# Altium PCB ADC_PIC32_LVDS_DRIVER_Subsystem.PcbDoc
Units mil, origin at the board's own origin, x right, y up, seen from the top; angles counter-clockwise.
Board outline 7000 x 5000 mil, 2 copper layers (Top Layer, Bottom Layer), stack 44.8 mil thick; 22 components, 56 nets, 174 pads, 27 vias.
Unrouted connection lines stored in the file: 3.
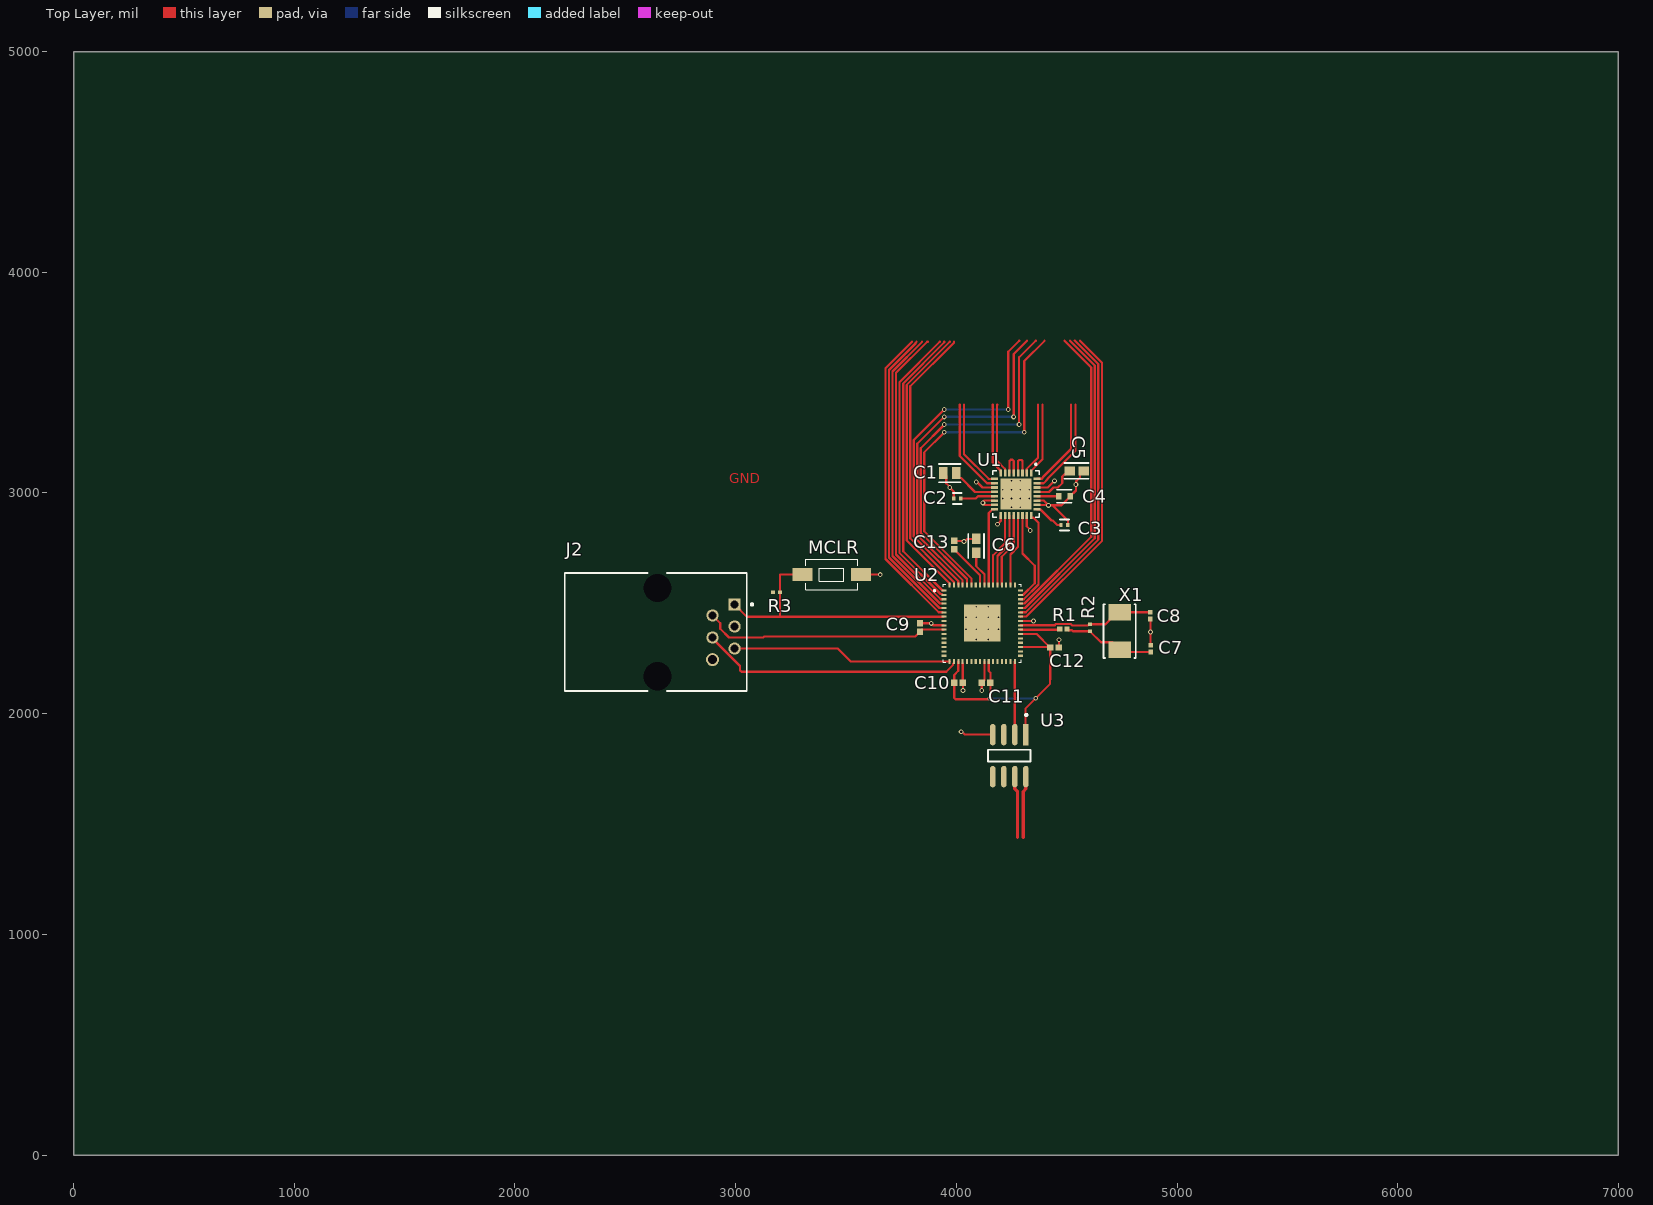
[diagram p0: Top Layer view]
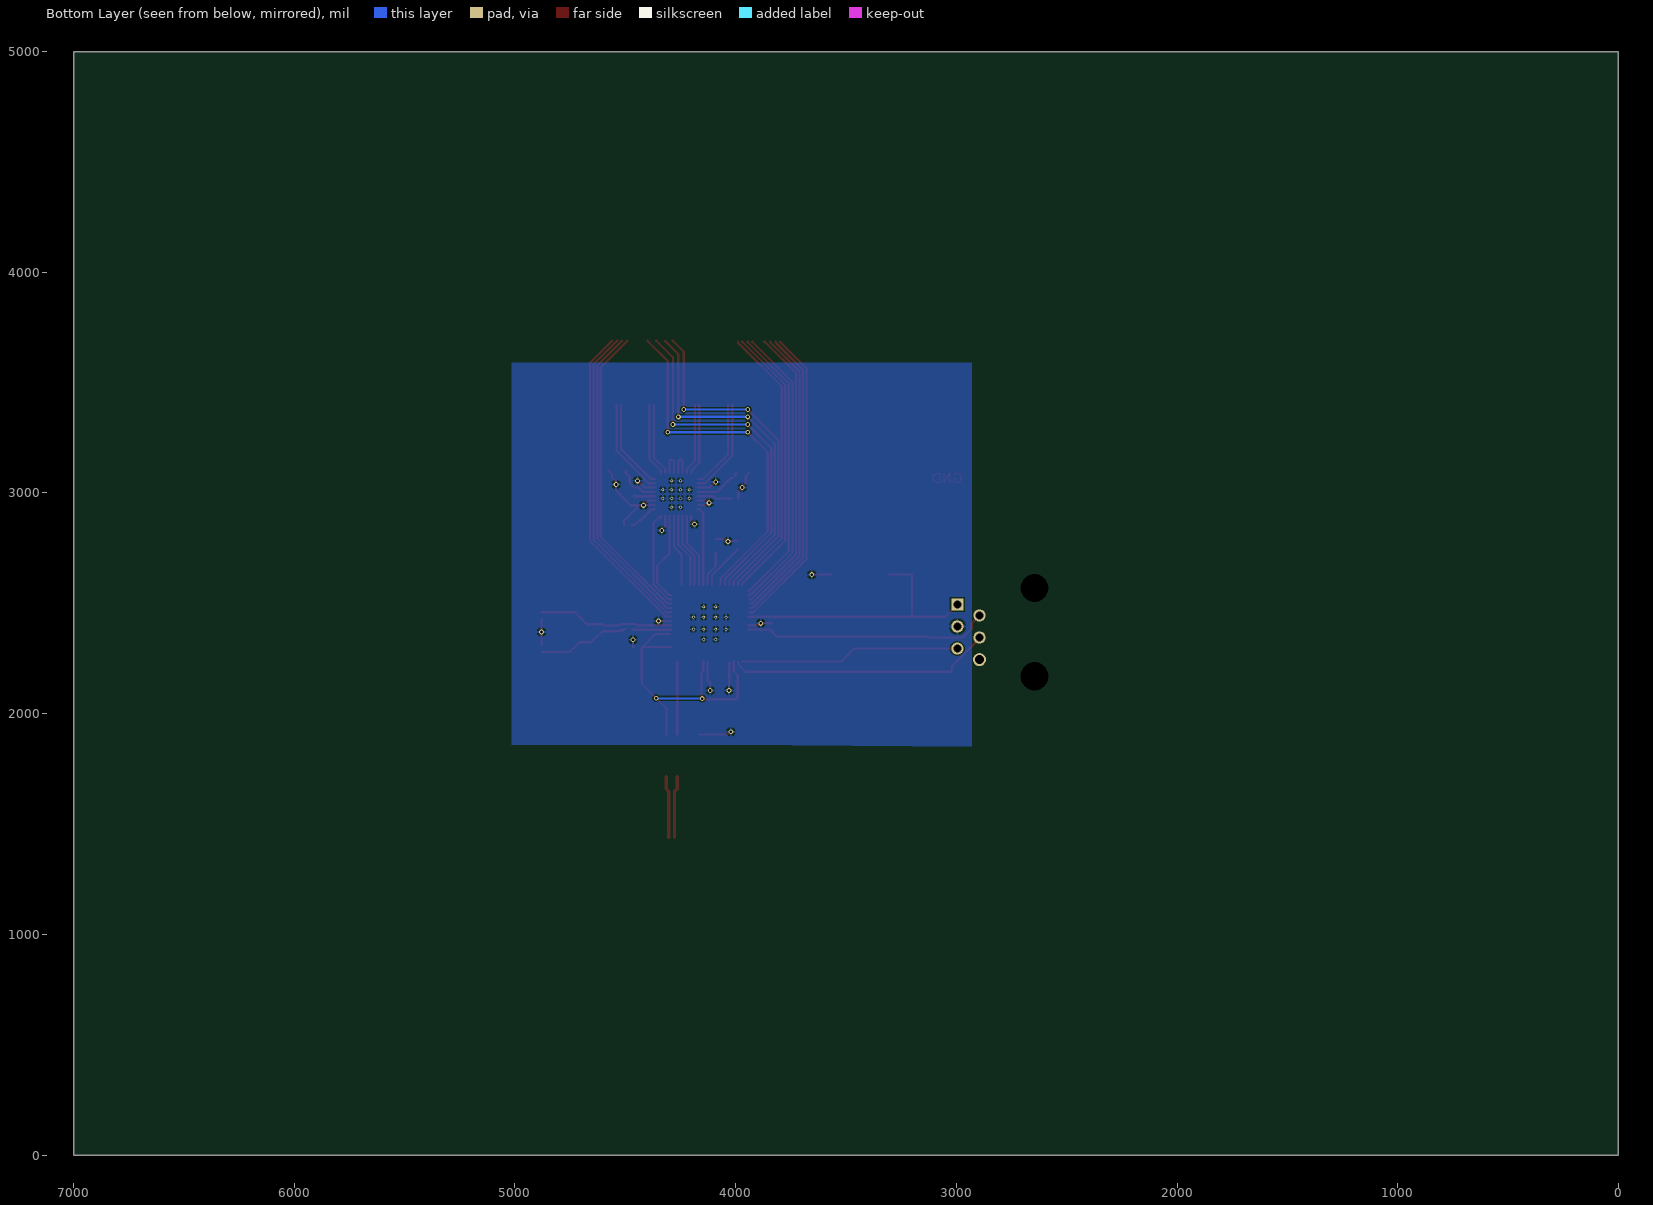
[diagram p1: Bottom Layer view, seen from below]
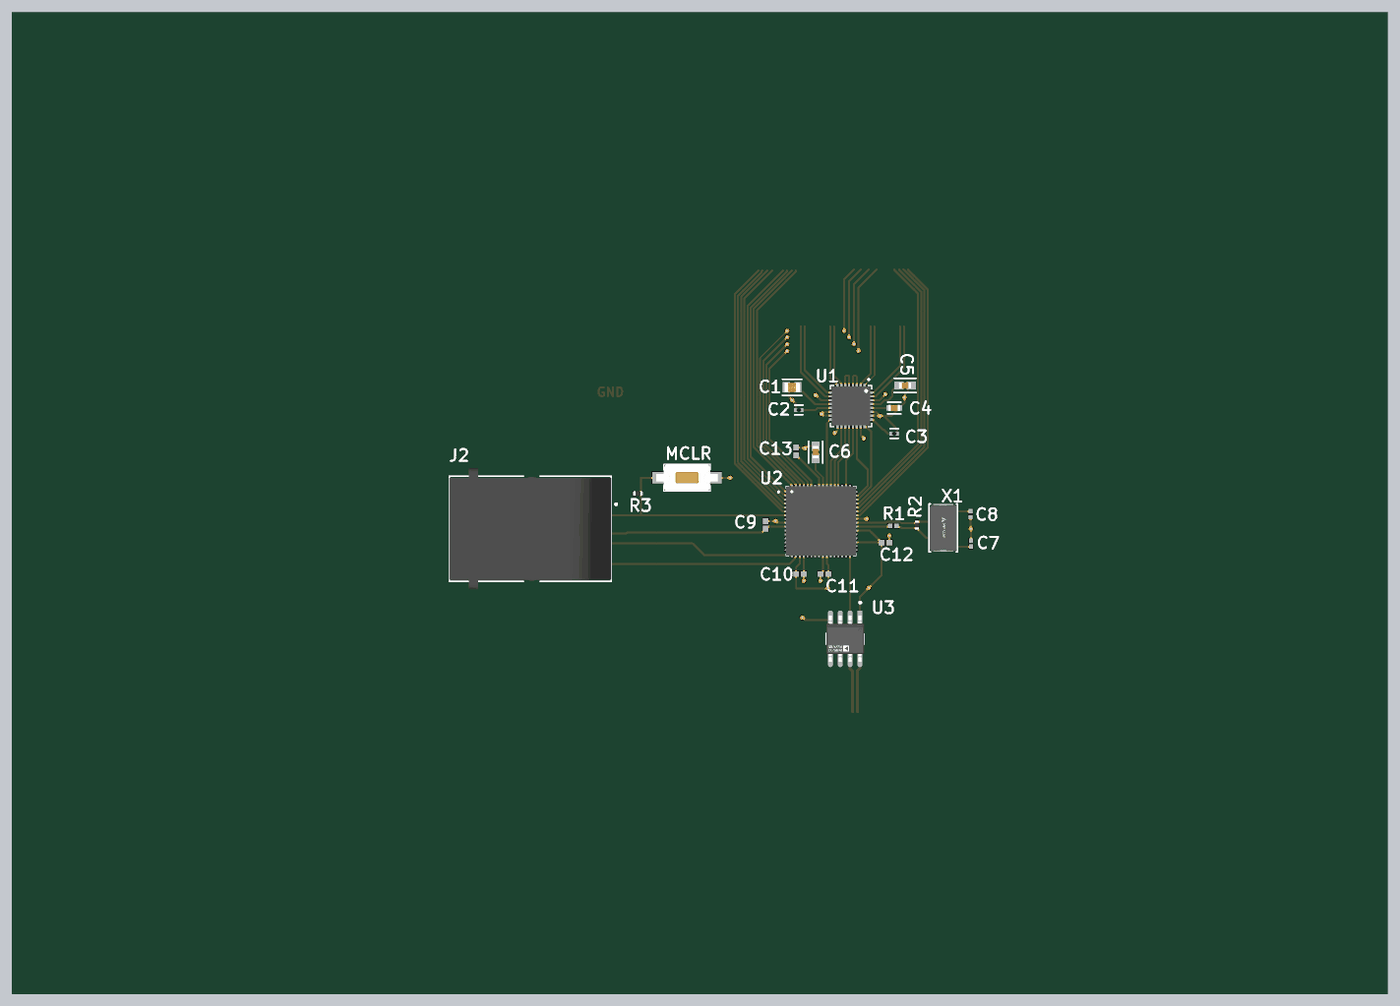
[diagram p2: 3D render of the assembled board from above, using the file's embedded part models]

## Layer stack, top to bottom
Top Solder: solder mask 0.4, Solder Resist, Dk 3.5
Top Layer: signal copper 1.4
Dielectric 1: dielectric 42, FR-4, Dk 4.8
Bottom Layer: signal copper 1.4
Bottom Solder: solder mask 0.4, Solder Resist, Dk 3.5

## Board outline
0,0 7000,0 7000,5000 0,5000

## Design rules (kind name [scope] priority, off if disabled: settings)
Clearance [All] p1: gap=6 ignorepadtopadclearanceinfootprint=FALSE
DiffPairsRouting [All] p1: maxlimit=12 minlimit=8 mostfreqgap=10 toplayer_minwidth=5 toplayer_maxwidth=15 toplayer_prefwidth=8 bottomlayer_minwidth=5 bottomlayer_maxwidth=15 bottomlayer_prefwidth=8 maxuncoupledlength=500
MinimumSolderMaskSliver [All] p1: minsoldermaskwidth=5
PolygonConnect [All] p1: connectstyle=Relief reliefconductorwidth=10 reliefentries=4 polygonreliefangle="90 Angle" airgapwidth=10
RoomDefinition PIC32_Subsystem [InComponentClass('PIC32_Subsystem')] p1: confinementstyle=ConfineIn formatcopy=TRUE lockcomponents=FALSE outline 3105,1780 4935,1780 4935,2845 3105,2845
RoomDefinition ADC_Subsystem [InComponentClass('ADC_Subsystem')] p2: confinementstyle=ConfineIn formatcopy=TRUE lockcomponents=FALSE outline 3775,2815 4785,2815 4785,3844.22 3775,3844.22
RoomDefinition PGA [InComponentClass('PGA')] p3: confinementstyle=ConfineIn formatcopy=TRUE lockcomponents=FALSE outline 3210,3380 5210,3380 5210,4985 3210,4985
RoomDefinition LVDS_Driver_Subsystem [InComponentClass('LVDS_Driver_Subsystem')] p4: confinementstyle=ConfineIn formatcopy=TRUE lockcomponents=FALSE outline 3815,1350 4400,1350 4400,2030 3815,2030
RoomDefinition ICD4_INTERFACE_MODULE [InComponentClass('ICD4_INTERFACE_MODULE')] p5: confinementstyle=ConfineIn formatcopy=TRUE lockcomponents=FALSE outline 3145,1940 2015,1940 2015,2870 3145,2870
RoutingVias [All] p1: holewidth=10 width=20 viastyle="Through Hole" minholewidth=9 minwidth=18 maxholewidth=25 maxwidth=48
ShortCircuit [All] p1: allowed=TRUE
SolderMaskExpansion [All] p1: expansion=4 istentingtop=FALSE
Width [All] p1: maxlimit=10 minlimit=5 preferedwidth=6 minimp=50.000000 maximp=50.000000 favimp=50.000000
27 further rules are at their usual default settings.

## Classes and differential pairs
component class PGA: U4 U5
component class ICD4_INTERFACE_MODULE: J2
net class N000-1_[0..8]: Input_Channels[0..8]
component class PIC32_Subsystem: C6 C7 C8 C9 C10 C11 C12 C13 MCLR MM R1 R2 R3 U2 X1
component class LVDS_Driver_Subsystem: U3
component class ADC_Subsystem: C1 C2 C3 C4 C5 MM U1
differential pair DOUT: +DOUT_P -DOUT_N
differential pair ADC_CH6_CH7: +ADC_CH6_CH7_P -ADC_CH6_CH7_N
differential pair ADC_CH4_CH5: +ADC_CH4_CH5_P -ADC_CH4_CH5_N
differential pair ADC_CH2_CH3: +ADC_CH2_CH3_P -ADC_CH2_CH3_N
differential pair ADC_CH0_CH1: +ADC_CH0_CH1_P -ADC_CH0_CH1_N

## Components (designator, comment, footprint, x,y, rotation, side; value= is the part's Value field where it differs from the comment)
C1 "47uF" FP-C0805C476M9PACTU-MFG 3970,3090 r180 top
C2 "0.1uF" FP-GRM15-MFG 4004.25,2975 r180 top value=0.10μF
C3 "0.1uF" FP-GRM15-MFG 4490,2855 r180 top value=0.10μF
C4 "2.2uF" FP-GRM188-0_1-e0_2_0_5-MFG 4490,2985 r180 top
C5 "10uF" FP-GRM188-0_1-e0_2_0_55-IPC_A 4545,3100 r180 top
C6 "10uF" FP-GRM188-0_1-e0_2_0_55-IPC_A 4090,2760 r90 top
C7 "18pF" CAPC1005X55X25LL05T10 4880,2294.56 r90 top
C8 "18pF" CAPC1005X55X25LL05T10 4878.43,2444.21 r270 top
C9 "0.1uF" CAPC1050X55X23ML05T13 3835,2390 r270 top
C10 "0.1uF" CAPC1050X55X23ML05T13 4010,2140 r180 top
C11 "0.1uF" CAPC1050X55X23ML05T13 4135,2140 r0 top
C12 "0.1uF" CAPC1050X55X23ML05T13 4445,2300 r180 top
C13 "0.1uF" CAPC1050X55X23ML05T13 3990,2764.29 r270 top
J2 "5520470-3" TECO-5520470-3_V 2700,2370 r270 top
MCLR "434121043816" 434121043816 3435,2630 r180 top
R1 "0R" RESC1005X40X25NL05T10 4485,2384.21 r0 top
R2 "1M" RESC1005X40X25LL05T05 4605,2389.21 r270 top
R3 "10k" RESC1005X40X25LL05T05 3185,2550 r180 top
U1 "LTC2373CUH-16#PBF" LTC_2373_Footprint 4270,2995 r270 top
U2 "PIC32MX470-F512H-120MR" QFN50P900X900X100-65N 4117.36,2410 r0 top
U3 "ADN4661BRZ" FP-R-8-IPC_A 4240,1810 r270 top
X1 "20MHz" FP-ABM7-MFG 4740,2374.21 r270 top

## Footprints (in the part's own frame and the unit in brackets; to place one, negate y for a bottom-side part, rotate by r counter-clockwise, add the part's x,y. Pads: shape width x height; smd on the part's side, far side on the other; paste and mask are expansions set on the pad)
434121043816 [mm] "6.0*3.5mm vertical type, SMD, height 4.3mm, black actuator, 160gf, T&R"
  rect 2.3x1.5 smd: 1(-3.35,0) 2(3.35,0)
  silkscreen extent -3,-1.75 3,1.75, body extent -4,-1.75 4,1.75, height 4.3
CAPC1005X55X25LL05T10 [mm] "Chip Capacitor, 2-Leads, Body 1.00x0.50mm, IPC High Density"
  rect 0.56x0.52 smd: 1(-0.39,0) 2(0.39,0)
  body extent -0.53,-0.28 0.53,0.28, height 0.55
CAPC1050X55X23ML05T13 [mm] "Chip Capacitor, 2-Leads, Body 1.05x0.55mm, IPC Low Density"
  rect 0.76x0.72 smd: 1(-0.49,0) 2(0.49,0)
  body extent -0.53,-0.28 0.53,0.27, height 0.55
FP-ABM7-MFG [mm]
  rect 1.9x2.6 smd paste+0 mask+0: 1(-2.15,0) 2(2.15,0)
  silkscreen extent -3.1,-1.85 3.1,1.85, body extent -3.2,-1.95 3.2,1.95, height 0.25
FP-C0805C476M9PACTU-MFG [mm]
  rect 0.95x1.35 smd paste+0 mask+0: 1(-0.75,0) 2(0.75,0)
  silkscreen extent -1.25,-1.05 1.25,1.05, body extent -1.4,-0.85 1.4,0.85, height 0.25
FP-GRM15-MFG [mm]
  rect 0.4x0.5 smd paste+0 mask+0: 1(-0.4,0) 2(0.4,0)
  silkscreen extent -0.53,-0.62 0.53,0.62, body extent -0.7,-0.38 0.7,0.38, height 0.25
FP-GRM188-0_1-e0_2_0_5-MFG [mm]
  rect 0.65x0.7 smd paste+0 mask+0: 1(-0.675,0) 2(0.675,0)
  silkscreen extent -0.85,-0.75 0.85,0.75, body extent -1.1,-0.55 1.1,0.55, height 0.25
FP-GRM188-0_1-e0_2_0_55-IPC_A [mil]
  rect 47.57x39.85 smd paste+0 mask+0: 1(-31.57,0) 2(31.57,0)
  silkscreen extent -55,-36 55,36, body extent -75,-40 75,40, height 10
FP-R-8-IPC_A [mil]
  rect 97.4x24.49 smd paste+0 mask+0: 1(-95.12,75)
  rrect100% 97.4x24.49 smd paste+0 mask+0: 2(-95.12,25) 3(-95.12,-25) 4(-95.12,-75) 5(95.12,-75) 6(95.12,-25) 7(95.12,25) 8(95.12,75)
  silkscreen extent -189,-96 27,96, body extent -164,-116 164,116, height 10
LTC_2373_Footprint [mm]
  rect 0.805x0.3 smd: 1(-2.452,1.75) 2(-2.452,1.25) 3(-2.452,0.75) 4(-2.452,0.25) 5(-2.452,-0.25) 6(-2.452,-0.75) 7(-2.452,-1.25) 8(-2.452,-1.75) 17(2.452,-1.75) 18(2.452,-1.25) 19(2.452,-0.75) 20(2.452,-0.25) 21(2.452,0.25) 22(2.452,0.75) 23(2.452,1.25) 24(2.452,1.75)
  rect 0.3x0.805 smd: 9(-1.75,-2.452) 10(-1.25,-2.452) 11(-0.75,-2.452) 12(-0.25,-2.452) 13(0.25,-2.452) 14(0.75,-2.452) 15(1.25,-2.452) 16(1.75,-2.452) 25(1.75,2.452) 26(1.25,2.452) 27(0.75,2.452) 28(0.25,2.452) 29(-0.25,2.452) 30(-0.75,2.452) 31(-1.25,2.452) 32(-1.75,2.452)
  rect 3.55x3.55 smd paste-3: 33(0,0)
  silkscreen extent -3.53,-2.67 2.67,2.67, body extent -2.5,-2.5 2.5,2.5, height 0.8
QFN50P900X900X100-65N [mm]
  rrect25% 0.6x0.24 smd: 1(-4.4,3.75) 2(-4.4,3.25) 3(-4.4,2.75) 4(-4.4,2.25) 5(-4.4,1.75) 6(-4.4,1.25) 7(-4.4,0.75) 8(-4.4,0.25) 9(-4.4,-0.25) 10(-4.4,-0.75) 11(-4.4,-1.25) 12(-4.4,-1.75) 13(-4.4,-2.25) 14(-4.4,-2.75) 15(-4.4,-3.25) 16(-4.4,-3.75) 33(4.4,-3.75) 34(4.4,-3.25) 35(4.4,-2.75) 36(4.4,-2.25) 37(4.4,-1.75) 38(4.4,-1.25) 39(4.4,-0.75) 40(4.4,-0.25) 41(4.4,0.25) 42(4.4,0.75) 43(4.4,1.25) 44(4.4,1.75) 45(4.4,2.25) 46(4.4,2.75) 47(4.4,3.25) 48(4.4,3.75)
  rrect25% 0.24x0.6 smd: 17(-3.75,-4.4) 18(-3.25,-4.4) 19(-2.75,-4.4) 20(-2.25,-4.4) 21(-1.75,-4.4) 22(-1.25,-4.4) 23(-0.75,-4.4) 24(-0.25,-4.4) 25(0.25,-4.4) 26(0.75,-4.4) 27(1.25,-4.4) 28(1.75,-4.4) 29(2.25,-4.4) 30(2.75,-4.4) 31(3.25,-4.4) 32(3.75,-4.4) 49(3.75,4.4) 50(3.25,4.4) 51(2.75,4.4) 52(2.25,4.4) 53(1.75,4.4) 54(1.25,4.4) 55(0.75,4.4) 56(0.25,4.4) 57(-0.25,4.4) 58(-0.75,4.4) 59(-1.25,4.4) 60(-1.75,4.4) 61(-2.25,4.4) 62(-2.75,4.4) 63(-3.25,4.4) 64(-3.75,4.4)
  rect 4.25x4.25 smd paste-1.53 mask+0: 65(0,0)
  round 0.3 hole 0.2 mask+0: 66(-0.695,1.875) 67(0.695,1.875) 68(-1.875,0.695) 69(-0.695,0.695) 70(0.695,0.695) 71(1.875,0.695) 72(-1.875,-0.695) 73(-0.695,-0.695) 74(0.695,-0.695) 75(1.875,-0.695) 76(-0.695,-1.875) 77(0.695,-1.875)
  silkscreen extent -5.59,-4.5 4.5,4.5, body extent -4.5,-4.5 4.5,4.5, height 1
RESC1005X40X25LL05T05 [mm] "Chip Resistor, 2-Leads, Body 1.05x0.55mm, IPC High Density"
  rect 0.45x0.45 smd: 1(-0.4,0) 2(0.4,0)
  body extent -0.53,-0.28 0.53,0.28, height 0.4
RESC1005X40X25NL05T10 [mm] "Chip Resistor, 2-Leads, Body 1.00x0.50mm, IPC Medium Density"
  rect 0.6x0.55 smd: 1(-0.425,0) 2(0.425,0)
  body extent -0.53,-0.27 0.53,0.28, height 0.4
TECO-5520470-3_V [mm] "THD, 6-Leads, Body 20.96x13.59mm, Pitch 1.27mm"
  rect 1.4x1.4 hole 0.89: 1(-3.175,7.5)
  round 1.4 hole 0.89: 2(-1.905,4.96) 3(-0.635,7.5) 4(0.635,4.96) 5(1.905,7.5)
  round 1.5 hole 1: 6(3.175,4.96)
  round 3 hole 3.25 unplated: MH1(-5.075,-1.39) MH2(5.085,-1.39)
  silkscreen extent -6.8,-12.06 6.8,9.62, body extent -7.87,-12.06 7.87,8.9, height 16.04

## Part data
C1: library part CMP-2007-01008-2, "CAP CER 47UF 6.3V X5R 0805 / C0805C476M9PACTU", Case Code (Imperial)=0805, Case Code (Metric)=2012, Dielectric=X5R, Dielectric Material=Ceramic, Max Operating Temperature=85°C, Min Operating Temperature=-55°C, Package Quantity=3000, Tolerance=20%, Voltage=6.3V, Capacitance=47uF, Case/Package=0805, Construction=Flat, Depth=1.25mm, Dissipation Factor=5%, Height=1.25mm, Length=2mm, Mount=PCB, Number of Pins=2, Packaging="Tape and Reel", Radiation Hardening=No, REACH SVHC="No SVHC", RoHS Compliant=Yes, Series=C0805C, Termination=SMD/SMT, Voltage Rating=6.3V, Voltage Rating (DC)=6.3V, Width=1.2mm
C2 C3: library part CMP-2100-03641-2, "CAP CER 0.1UF 16V X7R 0402 / GRM155R71C104KA88D", Capacitance=0.10μF, Manufacturer=Murata, Manufacturer Part Number=GRM155R71C104KA88D, Package=GRM15, Temperature="-55°C to +125°C", Temperature Characteristic=X7R, Temperature Range High=+125°C, Temperature Range Low=-55°C, Tolerance=10%, Voltage Rating=16Vdc, Category=Cap, ComponentLink2Description=Datasheet, ComponentLink2URL=https://search.murata.co.jp/Ceramy/image/img/A01X/G101/ENG/GRM155R71H471KA01-01A.pdf, Device Class L1="Passive Components", Device Class L2=Capacitors, Device Class L3="Ceramic Capacitors", Digikey Description="CAP CER 0.1UF 16V X7R 0402", Height=0.55mm, Ipc Land Pattern Name=CAPC10050X219, Lead Free=yes, Material=Ceramic, Mouser Description="0402 0.1 uF 16V ±10 % Tolerance X7R SMT Multilayer Ceramic Capacitor", Octopart=https://octopart.com/grm155r71c104ka88d-murata-196880, RoHS=TRUE, Standoff Height=0mm
C4: library part CMP-2006-02836-2, "Chip Multilayer Ceramic Capacitors for General Purpose, 0603, 2.2uF, X7R, 15%, 10%, 10V / GRM188R71A225KE15D", Case Code (Imperial)=0603, Case Code (Metric)=1608, Dielectric=X7R, Max Operating Temperature=125°C, Min Operating Temperature=-55°C, Package Quantity=1, Tolerance=10%, Voltage=10V, Capacitance=2.2uF, Case/Package=0603, Depth=0.8mm, Height=0.8mm, Lead Free="Lead Free", Length=1.6mm, Material=Ceramic, Mount="Surface Mount", Number of Pins=2, Packaging="Cut Tape", REACH SVHC="No SVHC", Termination=SMD/SMT, Thickness=0.035inch, Voltage Rating=10V, Voltage Rating (DC)=10V, Weight=7.1E-05oz, Width=0.031inch
C5 C6: library part CMP-2006-02792-2, "Chip Multilayer Ceramic Capacitors for General Purpose, 0603, 10uF, X5R, 15%, 20%, 6.3V / GRM188R60J106ME47D", Case Code (Imperial)=0603, Case Code (Metric)=1608, Dielectric=X5R, Max Operating Temperature=85°C, Min Operating Temperature=-55°C, Package Quantity=4000, Tolerance=20%, Voltage=6.3V, Capacitance=10uF, Case/Package=0603, Depth=0.8mm, Height=0.8mm, Lead Free="Lead Free", Length=1.6mm, Material=Ceramic, Mount="Surface Mount", Packaging="Tape and Reel", Radiation Hardening=No, REACH SVHC="No SVHC", Termination=SMD/SMT, Thickness=0.035inch, Voltage Rating=6.3V, Voltage Rating (DC)=6.3V, Width=0.031inch
C7 C8: library part CMP-2008-04271-1, "GRM1555C1H180GA01D", Manufacturer=Murata, Part Number=GRM1555C1H180GA01D
C9 C10 C11 C12 C13: library part CMP-2000-05439-1, "Chip Capacitor, 100 nF, +/- 10%, 16 V, -55 to 125 degC, 0402 (1005 Metric), RoHS, Tape and Reel / CL05B104KO5NNNC", Capacitance=100000pF, Case Size/Dimension=0402, Dielectric=X7R, Manufacturer="Samsung Electro-Mechanics", Rated Voltage=16V, Tolerance (%)=±10%, Datasheet URL=https://datasheet.ciiva.com/29198/458718-da-01-en-vs-kondensator-0402-29198423.pdf, Datasheet Version=Nov-10, Manufacturer URL=http://www.samsungsem.com/global/index.jsp
J2: library part CMP-1682-00001-5, "Modular Jack, 6 Position, Right Angle, RoHS, Tray", Colour=Black, Current Rating="1.5 A", Manufacturer="TE Connectivity", Max Voltage Rating (AC)="150 V", Package Quantity=176, ComponentLink1Description="Manufacturer URL", ComponentLink1URL=http://www.te.com/, ComponentLink2Description=Datasheet, ComponentLink2URL=http://www.te.com/commerce/DocumentDelivery/DDEController?Action=srchrtrv&DocNm=5520470&DocType=Customer+Drawing&DocLang=English, Contact Finish=Gold, Contact Material=Bronze, Contact Plating=Gold, DatasheetVersion="Rev. B1, 03/2011", Height="16.13 mm", Housing Material=PBT, Lead Pitch="2.54 mm", Length="13.34 mm", Mount="Through Hole", Mounting Technology="Through Hole", PackageDescription="Female Header, Pitch 1.27 mm, 2 x 3 Position, Height 16.13 mm, Tail Length 4.32 mm", PackageReference=5520470-3, Packaging=Tray, Pins=6, REACH SVHC=Unknown, RoHSCompliant=true, Voltage Rating="150 V"
MCLR: library part CMP-1459-00005-1, "WS-TASV SMD Tact Switch 6.0X3.5 mm", Manufacturer="Wuerth Elektronik", ComponentLink1Description="Manufacturer URL", ComponentLink1URL=http://www.we-online.com, ComponentLink2Description=Datasheet, ComponentLink2URL=http://katalog.we-online.de/em/datasheet/434121043816.pdf, NoPins=02, PackageReference=434121043816, PartNumber=434121043816
R1: library part CMP-1011-00001-2, "RC0402JR-070RL", Manufacturer="Yageo / Phycomp", Part Number=RC0402JR-070RL
R2: library part CMP-2002-00609-3, "Chip Resistor, 1 MOhm, +/- 1%, 100 mW, -55 to 155 degC, 0402 (1005 Metric), RoHS, Tape and Reel / ERJ-2RKF1004X", Case Code (Imperial)=0402, Case Code (Metric)=1005, Manufacturer="Basic Passives", Max Operating Temperature="155 degC", Min Operating Temperature="-55 degC", Package Quantity=10000, PartNumber=ERJ-2RKF1004X, Power Rating="100 mW", Resistance="1 MOhm", Tolerance=1%, Voltage Rating="50 V", Case\/Package=0402, ComponentLink1Description="Manufacturer URL", ComponentLink1URL=http://www.panasonic.com/, ComponentLink2Description=Datasheet, ComponentLink2URL=http://industrial.panasonic.com/cdbs/www-data/pdf/RDA0000/AOA0000C86.pdf, DatasheetVersion=04/2015, Height="0.35 mm", Length="1 mm", Mount="Surface Mount", Mounting Technology="Surface Mount", PackageDescription="2-Pin Surface Mount Device, Body 1 x 0.5 mm", PackageReference=0402, Packaging="Tape and Reel", Pins=2, Radiation Hardening=No, REACH SVHC=Yes, RoHSCompliant=true, Weight=2.8E-05oz, Width="0.5 mm"
R3: library part CMP-2000-07588-1, "Chip Resistor, 10 KOhm, +/- 1%, 0.1 W, -55 to 155 degC, 0402 (1005 Metric), RoHS, Tape and Reel / ERJ2RKF1002X", Case Code (Imperial)=0402, Case Code (Metric)=1005, Manufacturer=Panasonic, Max Operating Temperature=155degC, Max Power Dissipation=100mW, Min Operating Temperature=-55degC, Package Description="2-Pin Surface Mount Device, Body 1 x 0.5 mm", Package Quantity=1, Package Reference=402, Resistance=10KOhm, Temperature Coefficient=100ppm\/degreesC, Tolerance=1%, Voltage Rating=50V, Case\/Package=0402, Composition=ThickFilm, Contact Plating=Tin, Datasheet URL=https://industrial.panasonic.com/cdbs/www-data/pdf/RDA0000/AOA0000C304.pdf, Datasheet Version=02/2017, Depth=0.5mm, Height=0.35mm, Lead Free=LeadFree, Length=1mm, Manufacturer URL=http://www.panasonic.com/, Military Standard=Not, Mount=SurfaceMount, Mounting Technology=SurfaceMount, Number of Pins=2, Number of Terminations=2, Packaging=TapeandReel, Power Rating=100mW, Radiation Hardening=No, REACH SVHC=NoSVHC, RoHSCompliant=True, Termination=SMD/SMT, Voltage Rating (DC)=50V, Width=0.02inch
U3: library part CMP-09093-000114-1, "IC DRIVER 1/0 8SOIC", Case/Package=SOIC, Max Operating Temperature=85°C, Max Supply Current=10mA, Max Supply Voltage=3.6V, Min Operating Temperature=-40°C, Min Supply Voltage=3V, Nominal Supply Current=7mA, Operating Supply Voltage=3.3V, Package Quantity=98, Data Rate=600Mbps, Height=1.5mm, Lead Free="Contains Lead", Length=5mm, Mount="Surface Mount", Number of Drivers=1, Number of Elements=1, Number of Pins=8, Number of Receivers=1, Operating Supply Current=7mA, Packaging=Rail/Tube, Propagation Delay=1.5ns, Radiation Hardening=No, REACH SVHC="No SVHC", RoHS Compliant=Yes, Series=-, Supply Current=7mA, Turn-On Delay Time=1.5ns, Width=4mm
X1: library part CMP-27762-013587-1, "Crystal 20MHz ±20ppm 18pF SMD-2 6mm x 3.5mm / ABM7-20.000MHZ-D2Y-T", Case/Package=CSMD, ESR (Equivalent Series Resistance)=50R, Frequency Stability=30ppm, Frequency Tolerance=20ppm, Load Capacitance=18pF, Max Operating Temperature=85°C, Min Operating Temperature=-40°C, Operating Frequency="20 MHz", Package Quantity=1000, Resistor Type=Ceramic, Contact Plating=Gold, Depth=3.5mm, Frequency=20MHz, Height=0.055inch, Lead Free="Lead Free", Length=6mm, Mount="Surface Mount", Number of Pins=2, Packaging="Tape and Reel", Radiation Hardening=No, Series=ABM7, Series Resistance=50R, Termination=SMD/SMT, Tolerance=20ppm, Width=0.138inch

## Free pads (board coordinates)
  round 12 hole 8: ""(4210,2975) ""(4210,3015) ""(4250,2935) ""(4250,2975) ""(4250,3015) ""(4250,3055) ""(4290,2935) ""(4290,2975) ""(4290,3015) ""(4290,3055) ""(4330,2975) ""(4330,3015)

## Via types
v1: diameter 22, hole 12, Top Layer to Bottom Layer, 27 vias

## Nets (pads, with @x,y where several pads share a name; then routed paths per layer and width w, separated by ;. In a path a pad name is that pad's centre, name@x,y a point inside that pad or via, vN(x,y) a via of type N, cw(c..) or ccw(c..) an arc to the next point about the centre after c; other vN are vias at no path point)
+3.3V: C9.2 C10.2 C11.2 C12.2 C13.2 J2.2 R3.2 U2.10 U2.19 U2.26 U2.35 U2.38 U2.57 U3.1 | length 2792.5
  Top Layer w10: J2.2@2903.91,2453.63 J2.2 2930,2410.28 2930,2385 2970,2345 3125,2345 3130,2350 3814.29,2350 3825.04,2360.75 3825.83,2360.75 3835,2369.92 C9.2 ; C9.2@3833.4,2372.31 3841.92,2380.83 3937.24,2380.83 3937.6,2380.47 U2.10 ; C13.2 3990,2744.21 4107.52,2626.69 U2.57 ; U2.19 4009.09,2193.78 3990.71,2175.39 C10.2 3990.71,2070.86 3996.57,2065 4148.43,2065 v1(4151.36,2067.93) 4154.29,2070.86 C11.2 4154.29,2186 4146.89,2193.41 U2.26 ; U2.35 4290.87,2301.46 C12.2@4423.46,2301.46 ; U2.38@4297.4,2360.51 4364.41,2360.51 C12.2@4423.46,2301.46 ; U3.1 4313.96,1906.16 4313.96,2023.96 v1(4360,2070) 4425,2135 4425,2155 4425.71,2155.71 C12.2 4424.25,2301.46 C12.2@4423.46,2301.46
  Bottom Layer w10: v1(4151.36,2067.93) 4152.4,2068.96 4358.96,2068.96 v1(4360,2070)
+3.3V: C3.2 U1.25 | length 137.2
  Top Layer w10: U1.25 4367.46,2925.2 4381.73,2925.2 4431.54,2875.39 4436.29,2875.39 4456.68,2855 C3.2
+5V: C5.2 U1.29 | length 195.6
  Top Layer w10: U1.29 4419.84,3004.84 4440,3025 4460,3025 4479.64,3044.64 4479.64,3075.08 4489.64,3085.08 4494.64,3085.08 4498.43,3088.86 C5.2@4498.43,3100
ADC_CH0_CH1_N: U1.32 | length 410.9
  Top Layer w10: U1.32 4366.87,3064.21 4387.14,3064.21 4393,3070.07 4393,3072.4 4520,3199.4 4520,3399.35
ADC_CH0_CH1_P: U1.31 | length 443.9
  Top Layer w10: U1.31 4395.43,3044.21 4413,3061.79 4413,3064.11 4540,3191.11 4540,3399.35
ADC_CH2_CH3_N: U1.2 | length 329.9
  Top Layer w10: U1.2 4319.21,3109.17 4370.16,3160.12 4370.16,3400.11 4370,3400.27
ADC_CH2_CH3_P: U1.1 | length 329.9
  Top Layer w10: U1.1 4338.9,3101.02 4389.84,3151.96 4389.84,3400.11 4390,3400.27
ADC_CH4_CH5_N: U1.8 | length 323.5
  Top Layer w10: 4165,3400.12 4165.16,3399.97 4165.16,3136.96 4200.2,3101.92 4200.2,3092.46 U1.8
ADC_CH4_CH5_P: U1.7 | length 323.5
  Top Layer w10: 4185,3400.12 4184.84,3399.97 4184.84,3145.12 4219.88,3110.08 4219.88,3102.39 4220.79,3101.49 U1.7
ADC_CH6_CH7_N: U1.10 | length 442.4
  Top Layer w10: 4015,3400.11 4015,3167.53 4138.64,3043.9 4173.13,3043.9 U1.10
ADC_CH6_CH7_P: U1.9 | length 409.1
  Top Layer w10: 4035,3400.11 4035,3175.82 4146.92,3063.9 U1.9
ADCSDI_PIC32SDO: U1.20 U2.52 | length 337.7
  Top Layer w10: U2.52 4205.94,2711.58 4260.16,2765.79 U1.20
ADCSDO_PIC32SDI: U1.22 U2.47 | length 417
  Top Layer w10: U2.47 4302.31,2537.95 4355,2590.65 4355,2669.79 4299.53,2725.26 U1.22
DOUT_N: U3.8 | length 280.1
  Top Layer w15: 4302.5,1440 4302.5,1646.18 4315,1658.68 U3.8
DOUT_P: U3.7 | length 280.1
  Top Layer w15: U3.7 4265,1658.68 4277.5,1646.18 4277.5,1440
GND: C1.2 C2.2 C3.1 C4.1 C5.1 C6.2 C7.2 C8.2 C9.1 C10.1 C11.1 C12.1 C13.1 J2.3 MCLR.1 pad. U1.11 U1.14 U1.15 U1.17 U1.23 U1.26 U1.27 U1.30 U1.33 U2.9 U2.20 U2.25 U2.41 U2.65 U2.66 U2.67 U2.68 U2.69 U2.70 U2.71 U2.72 U2.73 U2.74 U2.75 U2.76 U2.77 U3.4 | length 1979.2
  Top Layer w10: MCLR.1 v1(3655,2630) ; C9.1 v1(3886.32,2409.29) 3895.45,2400.16 U2.9 ; C1.2 3954.17,3076.3 3954.17,3044.07 3970,3028.25 v1(3970,3025) 3988.5,3006.5 C2.2 ; C13.1 3991.79,2781.79 4033.21,2781.79 v1(4035,2780) 4038.25,2780 4049.82,2791.57 C6.2 ; v1@4018.6,1918.21 v1(4021.79,1918.21) 4025.04,1918.21 4038.13,1905.12 U3.4 ; U2.20@4029.06,2229.96 4029.29,2229.73 C10.1 4029.65,2139.65 4029.65,2105.35 v1(4030,2105) v1@4032.3,2107.3 ; v1(4090,3050) 4093.25,3050 4118.72,3024.53 U1.11 ; v1(4115,2105) 4115.35,2105.35 4115.35,2139.65 C11.1 ; C11.1@4116.5,2140 4127.2,2150.71 U2.25 ; U1.15 4129.21,2945.79 v1(4120,2955) 4120,2958.25 4125.47,2963.72 4125.47,2965.47 U1.14 ; v1(4186.79,2858.21) 4201.1,2872.52 U1.17 ; U2.41 4290.67,2419.92 v1(4349.92,2419.92) v1@4350,2420 ; U1.23 4319.21,2849.03 4335,2833.25 v1(4335,2830) ; U1.26 4415.97,2945.79 4396.28,2965.47 U1.27 ; U1.30 4414.53,3024.53 v1(4445,3055) ; v1(4417.76,2944) 4436.02,2944 ; C12.1 4464.65,2300.35 4464.65,2334.65 v1(4465,2335) ; C3.1 4505.75,2874.26 4436.02,2944 ; C5.1 4575.86,3100 4560.93,3085.08 4560.93,3070.93 4543.38,3053.38 4543.38,3039.8 v1(4541.79,3038.21) 4541.79,3011.2 4516.57,2985.98 C4.1 4516.57,2984.02 4476.55,2944 4436.02,2944 ; C8.2 4879.22,2428.07 4879.22,2370.78 v1(4880,2370) C7.2
MCLR: J2.1 MCLR.2 R3.1 U2.7 | length 1265
  Top Layer w10: J2.1 3050.75,2439.53 3200,2439.53 ; MCLR.2 3200.75,2630 3200.75,2440.28 3200,2439.53 ; U2.7 3200,2439.53
MUXOUT_ADCIN+: U1.3 U1.4 | length 131.3
  Top Layer w10: U1.4 4279.84,3144.84 4285,3150 4295,3150 4300,3145 4300,3092.02 U1.3
MUXOUT_ADCIN-: U1.5 U1.6 | length 130.7
  Top Layer w10: U1.6 4240.47,3144.53 4246.33,3150.39 4254.61,3150.39 4260,3145 4260,3091.71 U1.5
NetC6_1: C6.1 U2.56 | length 160.6
  Top Layer w10: C6.1 4090,2668.44 4127.2,2631.24 U2.56
NetC7_1: C7.1 R1.2 R2.2 X1.2 | length 421.8
  Top Layer w10: R1.2 4507.56,2378.38 4523.54,2378.38 4528.46,2373.46 R2.2 4655.28,2323.18 4707.6,2323.18 4751.57,2279.21 C7.1
NetC8_1: C8.1 R2.1 U2.40 X1.1 | length 620.2
  Top Layer w10: U2.40 4446.02,2400.16 4451.9,2406.03 4518.1,2406.03 4525.05,2399.08 4595.28,2399.08 4597.3,2401.1 4601.14,2401.1 R2.1 4675.75,2404.96 4693.82,2423.03 4693.82,2426.45 4726.93,2459.56 C8.1
NetR1_1: R1.1 U2.39 | length 177.4
  Top Layer w10: U2.39 R1.1@4468,2380.47
NetU1_16: U1.16 U2.55 | length 359.7
  Top Layer w10: U2.55 4146.89,2909.48 4163.51,2926.1 U1.16
NetU1_18: U1.18 U2.54 | length 337.7
  Top Layer w10: U2.54 4166.57,2717.46 4220.79,2771.68 U1.18
NetU1_19: U1.19 U2.53 | length 337.7
  Top Layer w10: U2.53 4186.26,2714.52 4240.47,2768.73 U1.19
NetU1_24: U1.24 U2.46 | length 442.3
  Top Layer w10: U2.46 4290.87,2518.54 4305.52,2518.54 4372.35,2585.37 4372.35,2865 4349.74,2887.61 4339.8,2887.61 4338.9,2888.51 U1.24
NetU2_1: U2.1 | length 1284.9
  Top Layer w10: U2.1 3937.6,2557.64 3759,2736.24 3759,3496.37 3945,3682.37 3945,3685
NetU2_2: U2.2 | length 1312.6
  Top Layer w10: 3925,3685 3743,3503 3743,2727.37 3928.46,2541.91 3933.64,2541.91 3937.6,2537.95 U2.2
NetU2_3: U2.3 | length 1318.8
  Top Layer w10: 3870,3685 3867.88,3685 3727,3544.12 3727,2720.74 3929.2,2518.54 U2.3@3937.32,2518.54
NetU2_4: U2.4 | length 1341.9
  Top Layer w10: 3845,3685 3845,3684.75 3711,3550.75 3711,2714.12 3926.26,2498.86 U2.4@3937.32,2498.86
NetU2_5: U2.5 | length 1366.2
  Top Layer w10: 3820,3685 3815,3680 3815,3677.37 3695,3557.37 3695,2707.49 3923.32,2479.17 U2.5@3937.32,2479.17
NetU2_6: U2.6 | length 1392.1
  Top Layer w10: 3799,3685 3679,3565 3679,2700.86 3920.37,2459.49 U2.6@3937.32,2459.49
NetU2_22: U2.22
NetU2_33: U2.33
NetU2_34: U2.34
NetU2_36: U2.36
NetU2_37: U2.37
NetU2_42: U2.42 | length 1459.9
  Top Layer w10: U2.42 4290.87,2439.8 4317.29,2439.8 4659.36,2781.87 4659.36,3590.9 4560.13,3690.13
NetU2_43: U2.43 | length 1436.3
  Top Layer w10: U2.43 4290.87,2459.49 4314.35,2459.49 4643.36,2788.5 4643.36,3584.27 4536.31,3691.31
NetU2_44: U2.44 | length 1409.2
  Top Layer w10: U2.44 4290.87,2479.17 4311.41,2479.17 4627.36,2795.12 4627.36,3577.64 4515,3690
NetU2_45: U2.45 | length 1384.9
  Top Layer w10: U2.45 4290.87,2498.86 4308.47,2498.86 4611.36,2801.75 4611.36,3568.64 4490,3690
NetU2_59: U2.59 | length 1633
  Top Layer w10: v1@3945.56,3274.44 3855,3183.89 3855,2826.13 4068.15,2612.98 U2.59 ; v1(4307.74,3275) 4307.74,3597.74 4400,3690
  Bottom Layer w10: v1(3945,3275) v1(4307.74,3275)
NetU2_60: U2.60 | length 1609
  Top Layer w10: v1@3947.5,3307.5 3943.61,3307.5 3839,3202.89 3839,2819.5 4048.46,2610.04 U2.60 ; v1(4284.5,3310) 4284.5,3614.5 4360,3690
  Bottom Layer w10: v1(3945,3310) v1(4284.5,3310)
NetU2_61: U2.61 | length 1587.2
  Top Layer w10: v1@3950,3345 v1(3945,3345) 3823,3223 3823,2809.63 4028.5,2604.12 4028.5,2583.5 U2.61 ; v1(4259.75,3345) 4259.75,3629.75 4320,3690
  Bottom Layer w10: v1(3945,3345) v1(4259.75,3345)
NetU2_62: U2.62 | length 1558.9
  Top Layer w10: v1@3946.76,3372.87 3945.68,3373.95 3941.08,3373.95 3807,3239.87 3807,2803 4008.82,2601.18 4008.82,2583.5 U2.62 ; v1(4235,3377.87) 4235,3640 4285,3690
  Bottom Layer w10: v1(3945,3377.87) v1(4235,3377.87)
NetU2_63: U2.63 | length 1266.4
  Top Layer w10: U2.63 3989.41,2595.59 3925,2660 3925,2660.22 3791,2794.22 3791,3483.12 3990,3682.12 3990,3685
NetU2_64: U2.64 | length 1263.2
  Top Layer w10: U2.64 3969.72,2589.76 3775,2784.49 3775,3489.75 3970,3684.75 3970,3685
PGC: J2.5 U2.17 | length 998.6
  Top Layer w10: J2.5 3462.76,2295 3520.99,2236.77 U2.17
PGD: J2.4 U2.18 | length 1198.9
  Top Layer w10: J2.4 2895.28,2340.47 3020,2215.75 3020,2195.86 3025.86,2190 3954.35,2190 3985.45,2221.1 3985.45,2226.28 3989.41,2230.24 U2.18
REFBUF: C1.1 U1.12 | length 213.8
  Top Layer w10: C1.1 3999.53,3082.13 4013.23,3068.43 4021.1,3068.43 4084.69,3004.84 U1.12
REFIN: C2.1 U1.13 | length 157.7
  Top Layer w10: C2.1 4088.11,2975 4098.27,2985.16 U1.13
Reserved: J2.6
SCK: U1.21 U2.50 | length 329.5
  Top Layer w10: U2.50 4245.32,2721.42 4279.84,2755.95 U1.21
UART_TX: U2.32 U3.2 | length 331.7
  Top Layer w10: U3.2 U2.32
VDDLBYP: C4.2 U1.28 | length 96.9
  Top Layer w10: U1.28 4366.63,2985.08 4463.35,2985.08 C4.2
pads on no net: J2.MH1 J2.MH2 U2.8 U2.11 U2.12 U2.13 U2.14 U2.15 U2.16 U2.21 U2.23 U2.24 U2.27 U2.28 U2.29 U2.30 U2.31 U2.48 U2.49 U2.51 U2.58 U3.3 U3.5 U3.6

## Polygon pours and split planes (outlines as drawn)
GND on Bottom Layer "GND_L02_P001" (solid, pour order 1): 4015,1860 2930,1850 2930,2584.21 2930,3590 5015,3590 5015,2660 5015,2344.21 5015,1860

## Other copper
Top Layer:
  text "GND" at 2970,3045 h45